# Altium PCB pneu-grove.PcbDoc
Units mil, origin at the board's own origin, x right, y up, seen from the top; angles counter-clockwise.
Board outline 1200 x 2000 mil, 2 copper layers (Top, Bottom); 13 components, 6 nets, 44 pads, 2 vias.
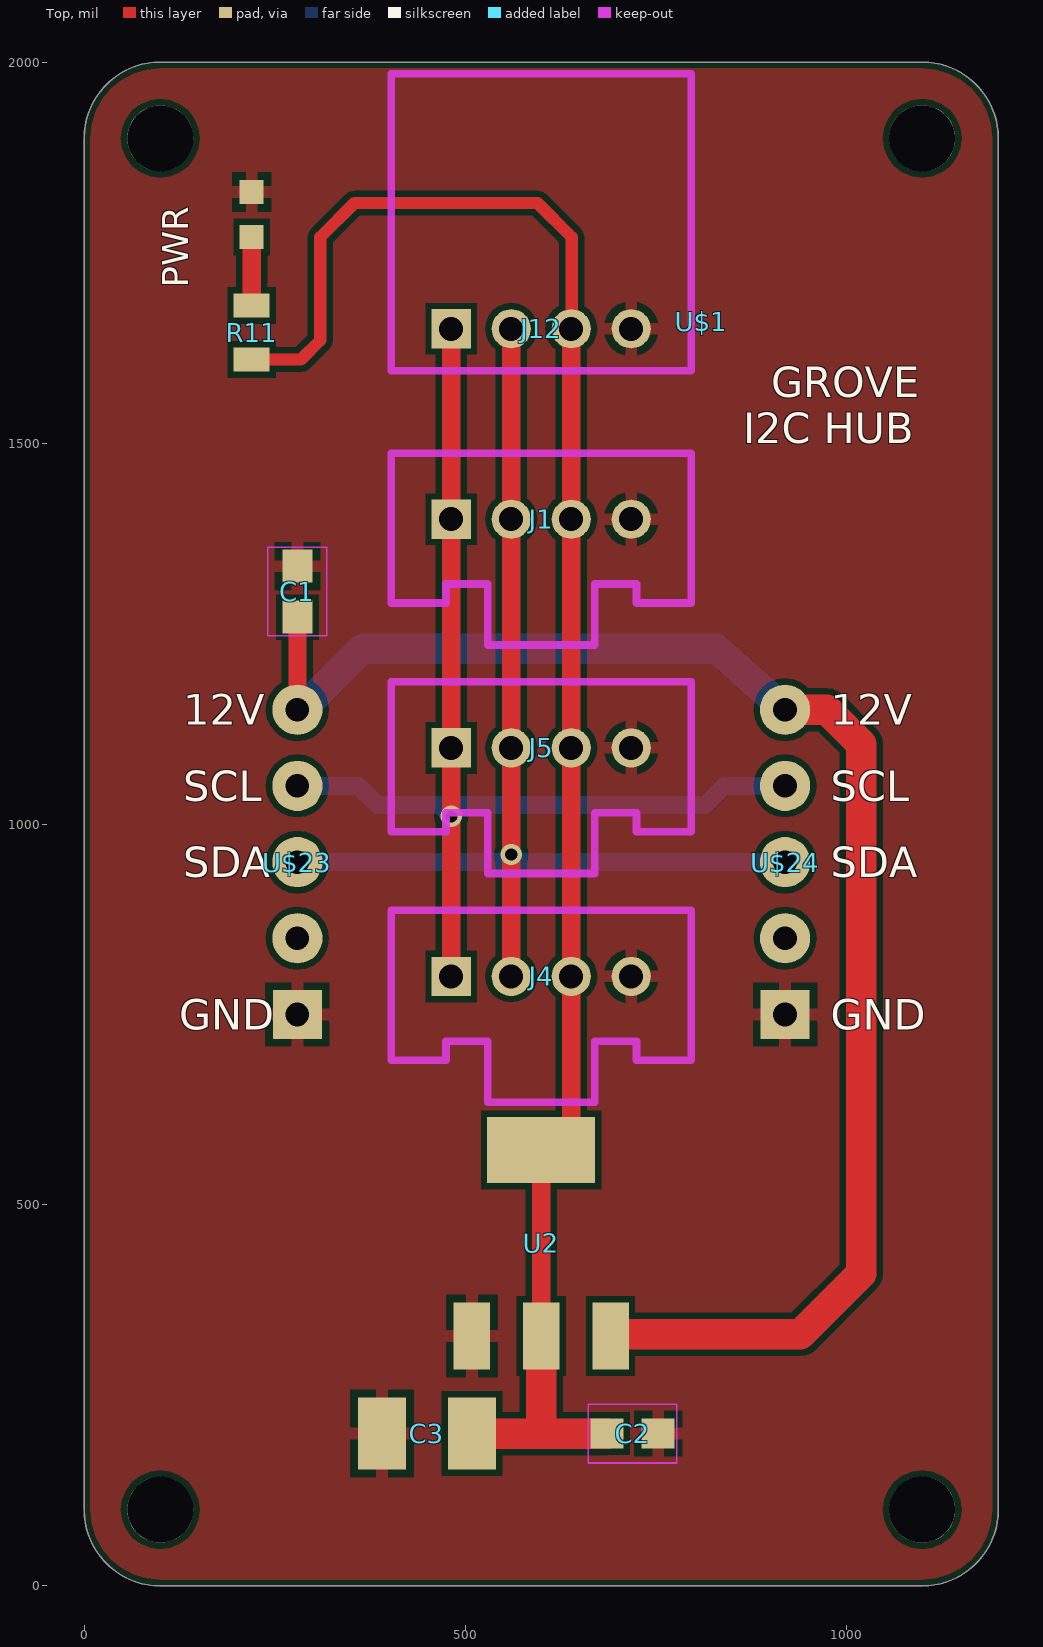
[diagram p0: Top view]
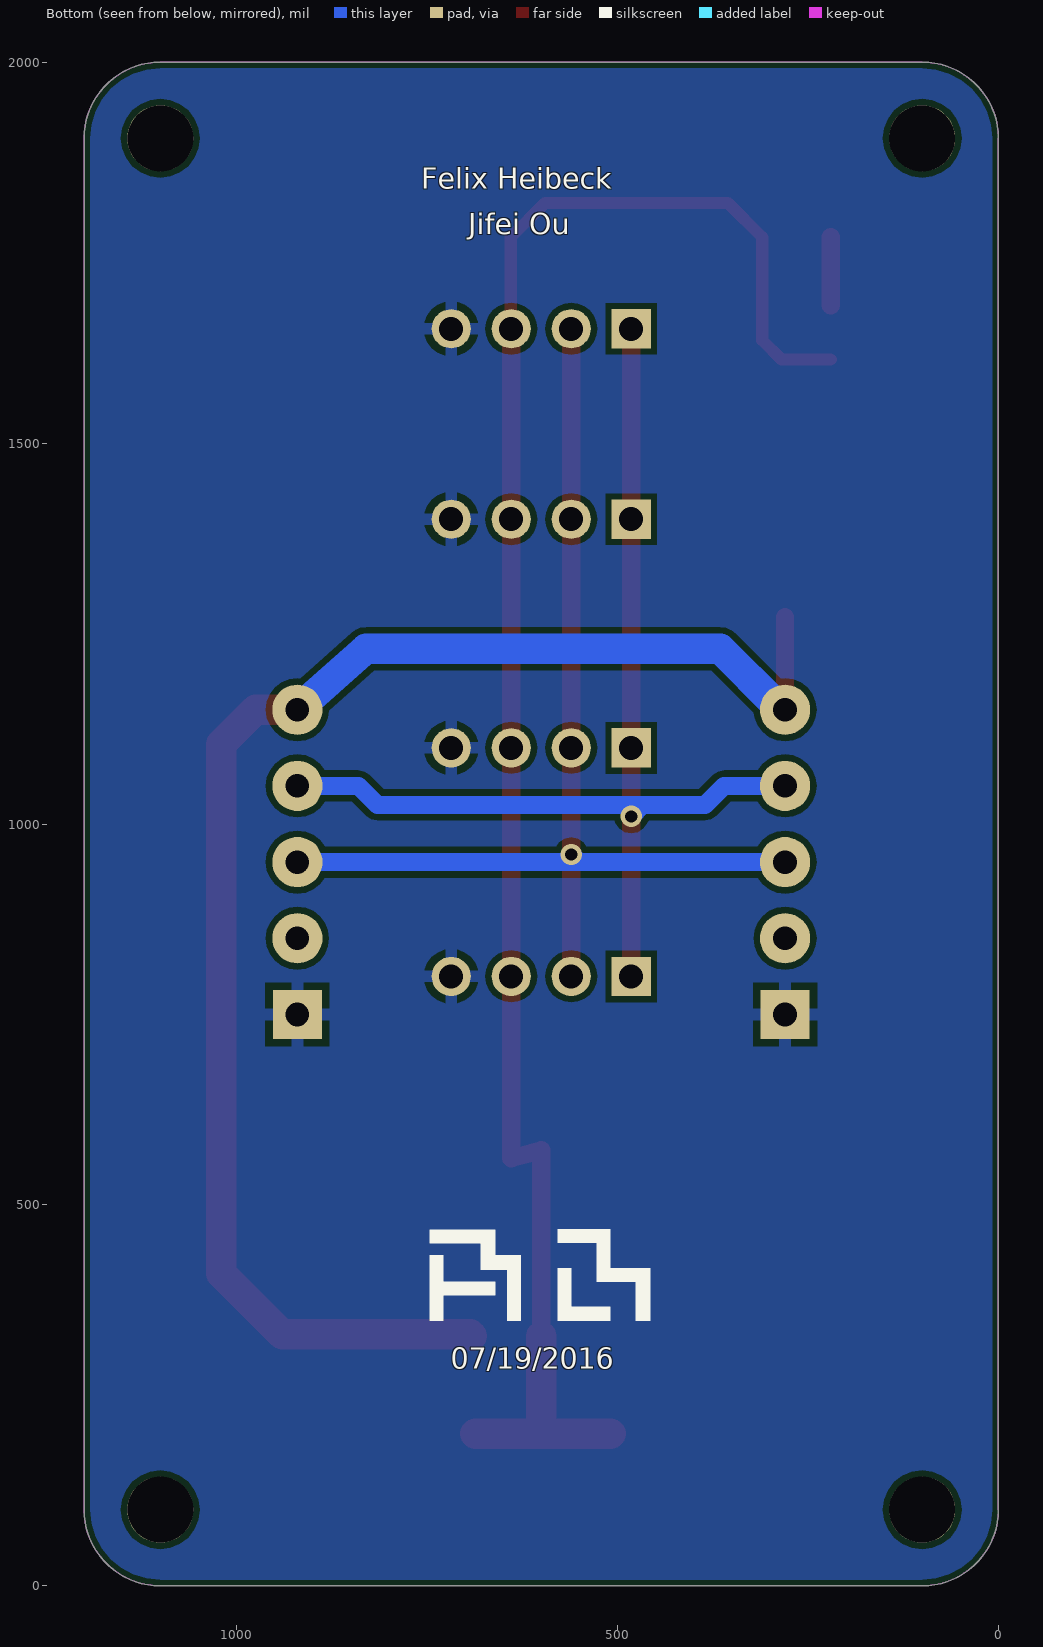
[diagram p1: Bottom view, seen from below]

## Layer stack, top to bottom
Top Solder: solder mask 0.4, Solder Resist, Dk 3.5
Top: signal copper 1.378
Dielectric 1: dielectric 12.6, FR-4, Dk 4.8
Bottom: signal copper 1.378
Bottom Solder: solder mask 0.4, Solder Resist, Dk 3.5

## Board outline
100,0 1100,0 ccw(c1100,100) 1200,100 1200,1900 ccw(c1100,1900) 1100,2000 100,2000 ccw(c100,1900) 0,1900 0,100 ccw(c100,100)

## Design rules (kind name [scope] priority, off if disabled: settings)
Clearance "Clearance (Same Net)" [All] p1: gap=8 ignorepadtopadclearanceinfootprint=FALSE except(0: SMDPad-SMDPad SMDPad-THPad SMDPad-Via)
Clearance [All] p2: gap=8 ignorepadtopadclearanceinfootprint=FALSE
HoleSize HoleSize_For_NetClass_vcc [InNetClass('vcc')] p1: absolutevalues=TRUE maxlimit=0 minlimit=0 maxpercent=80.000 minpercent=20.000
HoleSize [All] p2: absolutevalues=TRUE maxlimit=100000 minlimit=12 maxpercent=80.000 minpercent=20.000
HoleToHoleClearance mdDrill [All] p1: gap=10 allowstackedmicrovias=TRUE
PasteMaskExpansion mlMinCreamFrame [All] p1: expansion=0
PolygonConnect ThermalVias [IsVia] p1: connectstyle=Direct reliefconductorwidth=10 reliefentries=4 polygonreliefangle="90 Angle" airgapwidth=10
PolygonConnect [All] p2: connectstyle=Relief reliefconductorwidth=16 reliefentries=4 polygonreliefangle="90 Angle" airgapwidth=10
RoutingVias [All] p1: holewidth=12 width=24 viastyle="Through Hole" minholewidth=12 minwidth=24 maxholewidth=100 maxwidth=100
SolderMaskExpansion mlMinStopFrame [All] p1: expansion=2
Width Width_For_NetClass_vcc [InNetClass('vcc')] p1: maxlimit=10 minlimit=10 preferedwidth=10
Width [All] p2: maxlimit=10000 minlimit=10 preferedwidth=10
27 further rules are at their usual default settings.

## Components (designator, comment, footprint, x,y, rotation, side; value= is the part's Value field where it differs from the comment)
C1 "0.1uF" 0603-CAP#1 180,1305 r90 top
C2 "0.1uF" 0603-CAP#2 620,200 r0 top
C3 "22uF" SMC_B 350,200 r180 top
J1 "" 2.0_1X4 500,1400 r0 top
J4 "" 2.0_1X4 500,800 r0 top
J5 "" 2.0_1X4 500,1100 r0 top
J12 "" 4P-2.0-90D 500,1650 r0 top
PWR "" CHIPLED_0603 120,1800 r0 top
R11 "1k" 0805 120,1645 r270 top
U2 "" LINEAR_SOT223 500,450 r0 top
U$1 "" TWIGLOGO_SMALL 810,1660 r0 top
U$23 "" 1X05_TIGHT 180,950 r90 top
U$24 "" 1X05_TIGHT 820,950 r90 top

## Footprints (in the part's own frame and the unit in brackets; to place one, negate y for a bottom-side part, rotate by r counter-clockwise, add the part's x,y. Pads: shape width x height; smd on the part's side, far side on the other; paste and mask are expansions set on the pad)
1X05_TIGHT [mil] "1X05_TIGHT"
  round 66 / inner round 60 / far side round 66 hole 31: P$1(200,-100) P$2(0,-100) P$3(100,-100) P$4(-100,-100)
  rect 63.9x63.9 / inner rect 60x60 / far side rect 63.9x63.9 hole 31: P$5(-200,-100)
2.0_1X4 [mil] "2.0_1X4"
  rect 51.5x51.5 / inner rect 60x60 / far side rect 51.5x51.5 hole 31.5: 1(-18.11,0)
  round 51.5 / inner round 60 / far side round 51.5 hole 31.5: 2(60.63,0) 3(139.37,0) 4(218.11,0)
  Top keep-out lines w10: -96.85,-110.24 -96.85,86.61 296.85,86.61 296.85,-110.24 ; -95,-110 -25,-110 -25,-90 -25,-85 30,-85 30,-165 170,-165 170,-90 170,-85 225,-85 225,-110 295,-110
4P-2.0-90D [mil] "4P-2.0-90D"
  rect 51.5x51.5 / inner rect 60x60 / far side rect 51.5x51.5 hole 31.5: 1(-18.11,0)
  round 51.5 / inner round 60 / far side round 51.5 hole 31.5: 2(60.63,0) 3(139.37,0) 4(218.11,0)
  Top keep-out lines w10: -96.85,-55.12 -96.85,334.65 296.85,334.65 296.85,-55.12 -96.85,-55.12
0603-CAP#1 [mm] "0603-CAP"
  rect 1.1x1 smd: 1(-0.85,-2.54) 2(0.85,-2.54)
  Top keep-out lines w0.051: -1.473,-1.557 -1.473,-3.523 1.473,-3.523 1.473,-1.557 -1.473,-1.557
0603-CAP#2 [mm] "0603-CAP"
  rect 1.1x1 smd: 1(1.69,0) 2(3.39,0)
  Top keep-out lines w0.051: 1.067,-0.983 1.067,0.983 4.013,0.983 4.013,-0.983 1.067,-0.983
0805 [mil] "0805"
  rect 31.5x47.24 smd: 1(-35.43,100) 2(35.43,100)
CHIPLED_0603 [mil] "CHIPLED_0603"
  rect 31.5x31.5 smd: A(100,-29.53) C(100,29.53)
LINEAR_SOT223 [mil] "LINEAR_SOT223"
  rect 48x88 smd: 1(9,-122) 2(100,-122) 3(191,-122)
  rect 141.73x86.61 smd: 4(100,122.01)
SMC_B [mil] "SMC_B"
  rect 62.99x94.49 smd: +(-159.06,0) -(-40.94,0)
TWIGLOGO_SMALL [mil] "TWIGLOGO_SMALL"

## Part data
C1 C2: library part 0603-CAP, PackageName=0603-CAP
C3: library part SMC_B, PackageName=SMC_B
J1 J4 J5: library part 2.0_1X4, PackageName=2.0_1X4
J12: library part 4P-2.0-90D, PackageName=4P-2.0-90D
PWR: library part CHIPLED_0603, PackageName=CHIPLED_0603
R11: library part 0805, PackageName=0805
U2: library part LINEAR_SOT223, PackageName=LINEAR_SOT223
U$1: library part TWIGLOGO_SMALL, PackageName=TWIGLOGO_SMALL
U$23 U$24: library part 1X05_TIGHT, PackageName=1X05_TIGHT

## Free pads (board coordinates)
  round 86.61 hole 86.61 unplated: MH1(100,1900) MH2(1100,1900) MH3(1100,100) MH4(100,100)

## Via types
v1: diameter 28/28 (per signal layer), hole 16, Top to Bottom, tented both sides, 2 vias

## Nets (pads, with @x,y where several pads share a name; then routed paths per layer and width w, separated by ;. In a path a pad name is that pad's centre, name@x,y a point inside that pad or via, vN(x,y) a via of type N, cw(c..) or ccw(c..) an arc to the next point about the centre after c; other vN are vias at no path point)
+5V: C2.1 C3.+ J1.3 J4.3 J5.3 J12.3 R11.2 U2.2 U2.4 | length 2402
  Top w16: R11.2 284.57,1609.57 310,1635 310,1770 355,1815 595,1815 640,1770 640,1650.63 J12.3
  Top w24: U2.2 U2.4 639.37,561.38 J4.3 J5.3 J1.3 J12.3
  Top w40: C3.+ 600,200 ; U2.2 600,200 ; C2.1 600,200
GND: C1.2 C2.2 C3.- J1.4 J4.4 J5.4 J12.4 PWR.C U2.1 U$23.P$5 U$24.P$5
N$10: PWR.A R11.1 | length 90
  Top w24: R11.1 PWR.A
SCL: J1.1 J4.1 J5.1 J12.1 U$23.P$3 U$24.P$3 | length 1531.9
  Top w24: J4.1 v1(481.89,1010) J5.1 J1.1 J12.1
  Bottom w24: U$23.P$3 360,1050 385,1025 466.89,1025 ; v1(481.89,1010) 466.89,1025 ; U$24.P$3 840,1050 815,1025 466.89,1025
SDA: J1.2 J4.2 J5.2 J12.2 U$23.P$2 U$24.P$2 | length 1774.8
  Top w24: J4.2 v1(560.63,960) J5.2 J1.2 J12.2
  Bottom w24: v1(560.63,960) 550.63,950 U$23.P$2 U$24.P$2
VIN: C1.1 U2.3 U$23.P$1 U$24.P$1 | length 2000.8
  Top w24: U$23.P$1 C1.1
  Top w40: U2.3 693,330 940,330 1020,410 1020,1105 975,1150 U$24.P$1
  Bottom w40: U$23.P$1 290,1155 365,1230 830,1230 U$24.P$1
pads on no net: U$23.P$4 U$24.P$4

## Polygon pours and split planes (outlines as drawn)
GND on Bottom "Polygon_1_Net_GND" (solid, remove dead copper, pour order 0): 2,2177.93 1218,2188.07 1218,-117.93 2,-128.07
GND on Top "Polygon_2_Net_GND" (solid, remove dead copper, pour order 1): -48,2148 1218,2148 1218,-98 -48,-98

## Keep-outs
Keep-Out Layer:
  the board outline again, w0

## Silkscreen, mask and mechanical layers (free items; w line width, h text height)
Top Overlay:
  text "GROVE" at 901.7,1560 h40
  text "I2C HUB" at 865.04,1500 h40
  text "12V" at 130,1130 h40
  text "12V" at 980,1130 h40
  text "SCL" at 130,1030 h40
  text "SCL" at 980,1030 h40
  text "SDA" at 130,930 h40
  text "SDA" at 980,930 h40
  text "GND" at 125,730 h40
  text "GND" at 980,730 h40
Bottom Overlay:
  drawing of 354 lines, arcs and shapes, not listed
  text "Felix Heibeck" at 757.66,1824.72 h46.5
  text "Jifei Ou" at 695.48,1764.72 h46.5
  text "07/19/2016" at 718.89,275.62 h46.5
Dimension:
  the board outline again, w0
Top Assembly:
  text "5V" at 655,1515 h49.6 r90
  text "5V" at 655,1515 h49.6 r90
  text "SCL" at 495,1500 h49.6 r90
  text "SDA" at 575,1500 h49.6 r90
  text "GND" at 735,1500 h49.6 r90
  text "5V" at 655,1220 h49.6 r90
  text "SCL" at 495,1205 h49.6 r90
  text "SDA" at 575,1205 h49.6 r90
  text "GND" at 735,1205 h49.6 r90
  text "5V" at 655,925 h49.6 r90
  text "SCL" at 495,905 h49.6 r90
  text "SDA" at 575,905 h49.6 r90
  text "GND" at 735,900 h49.6 r90

## Text inside footprints (layer, text, board x,y; h text height)
U2: Top Assembly "2" at 549.19,279.63 h49.6; Top Assembly "1" at 464.07,280 h49.6; Top Assembly "4" at 675,550 h49.6; Top Assembly "3" at 640.19,280 h49.6